# Altium PCB DigitalSensor.PcbDoc
Units mm, origin at the board's own origin, x right, y up, seen from the top; angles counter-clockwise.
Board outline 38.47 x 24.09 mm, 2 copper layers (Top Layer, Bottom Layer); 37 components, 25 nets, 144 pads, 37 vias.
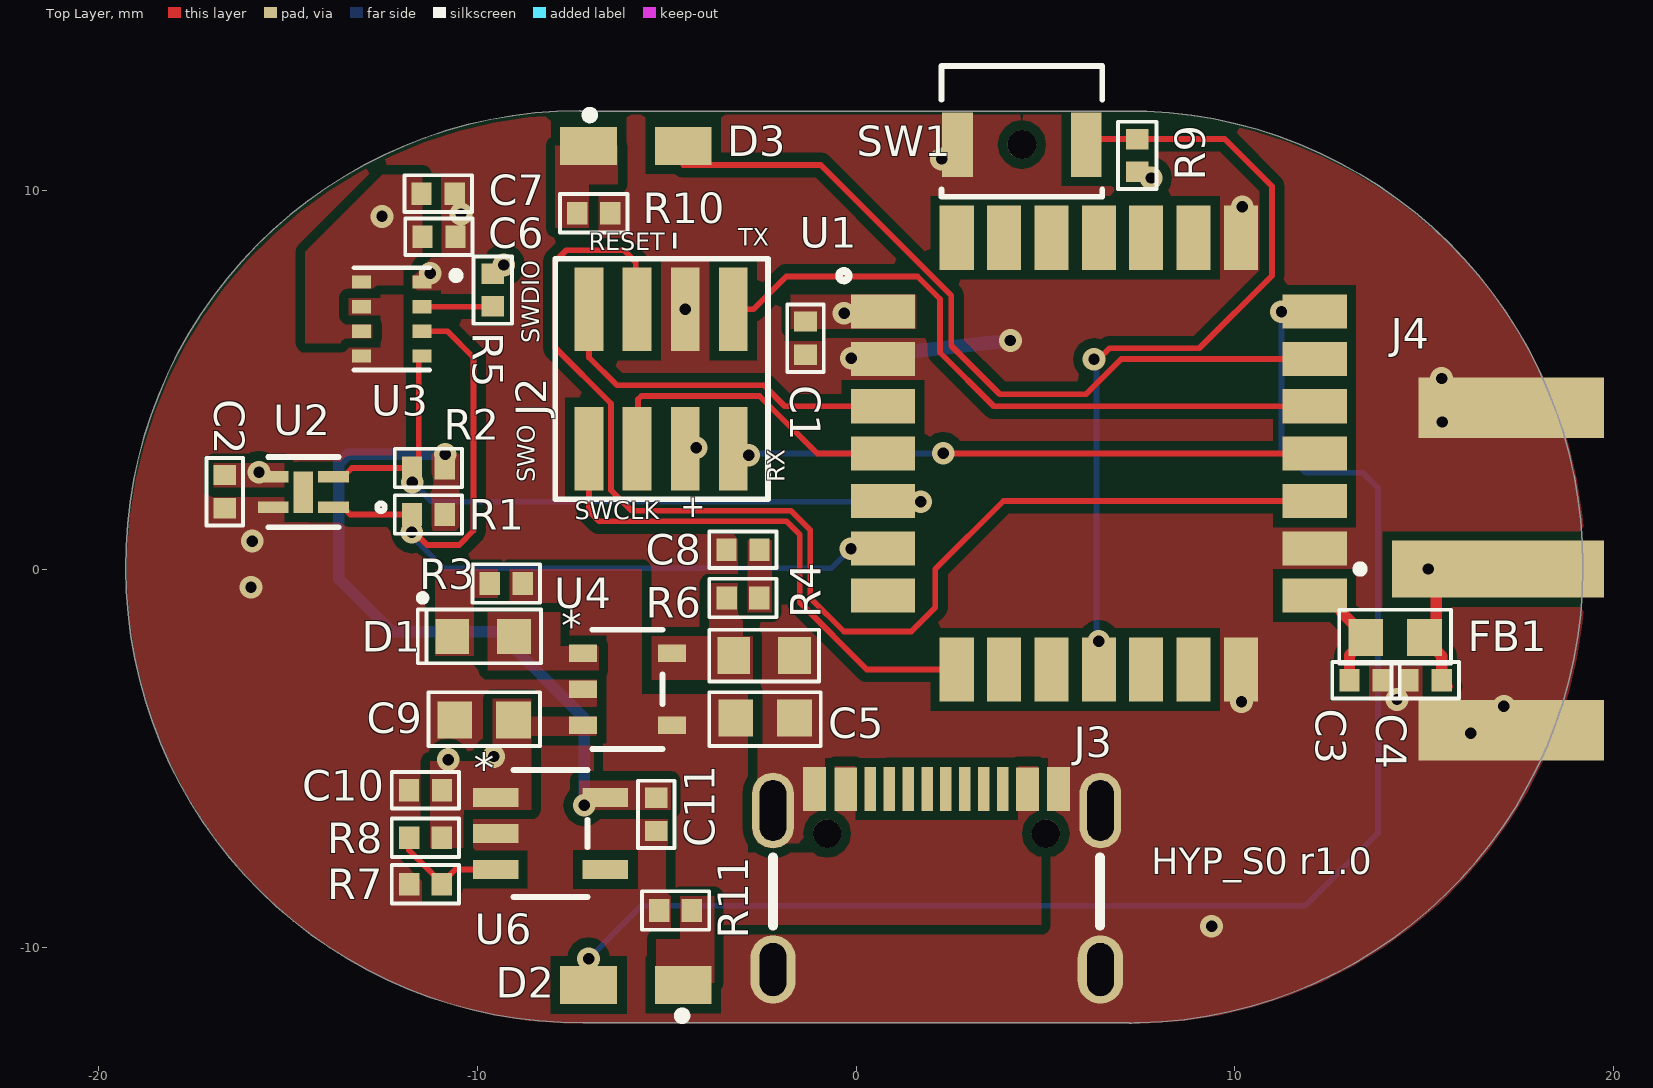
[diagram p0: Top Layer view]
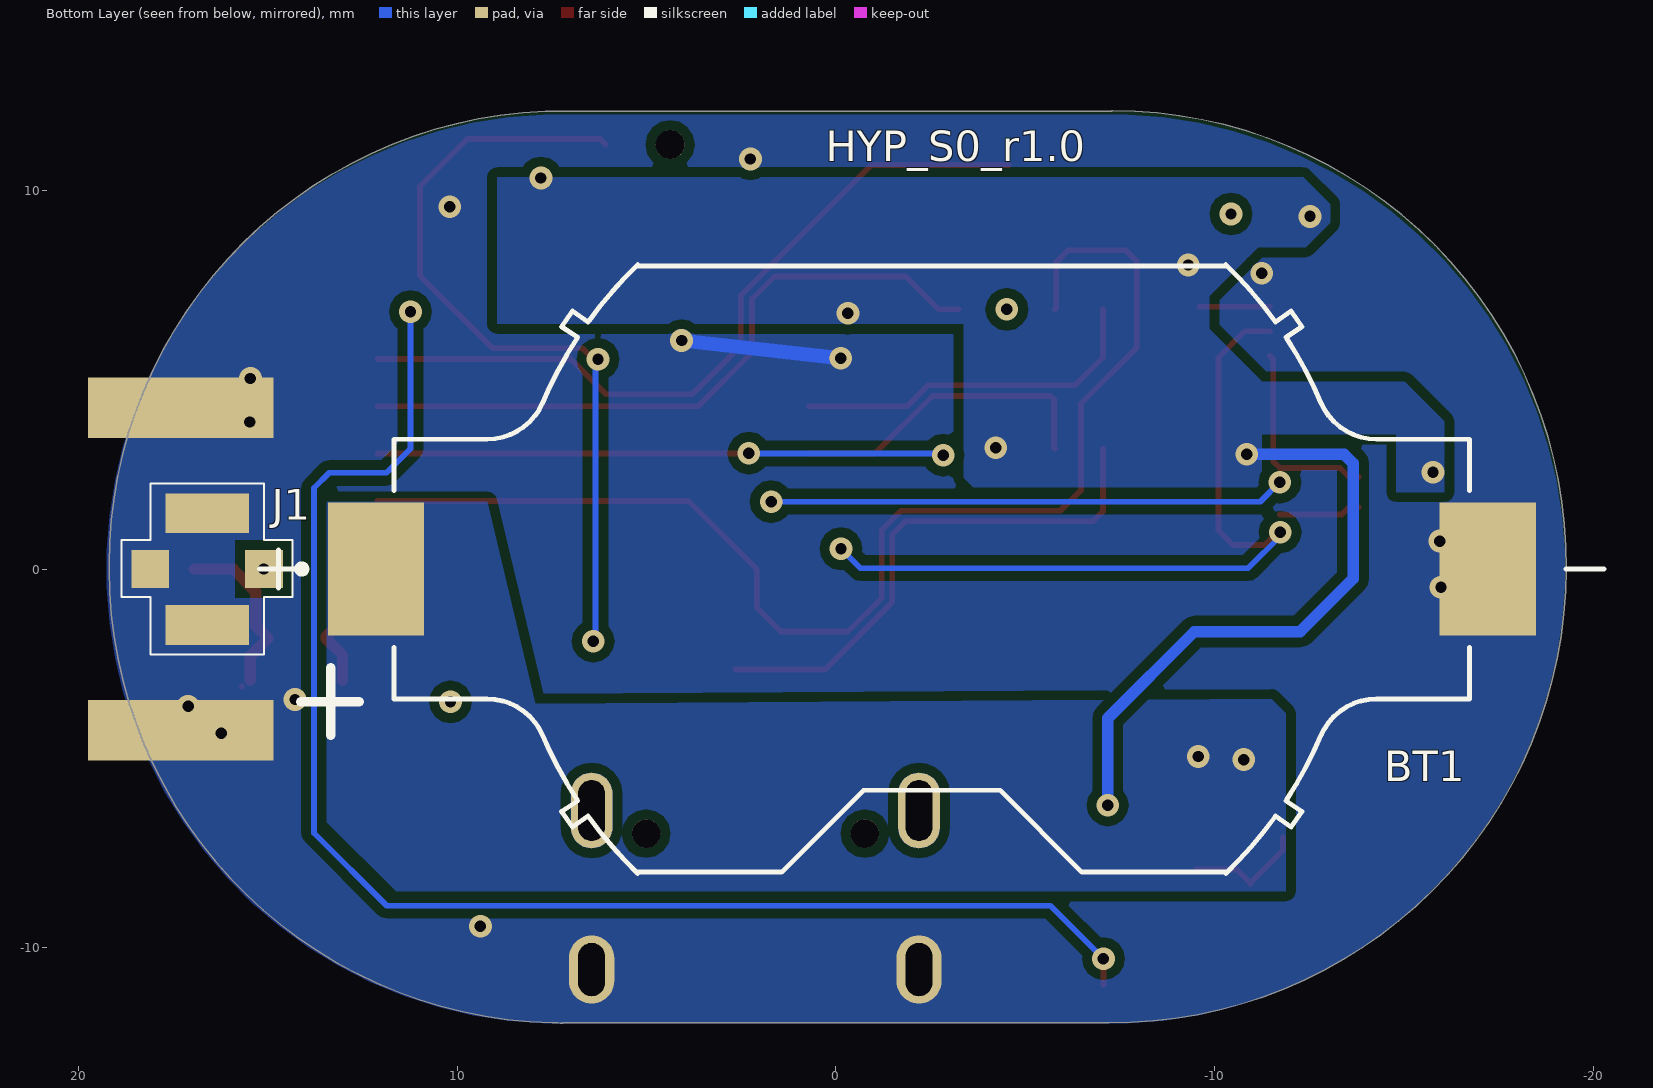
[diagram p1: Bottom Layer view, seen from below]
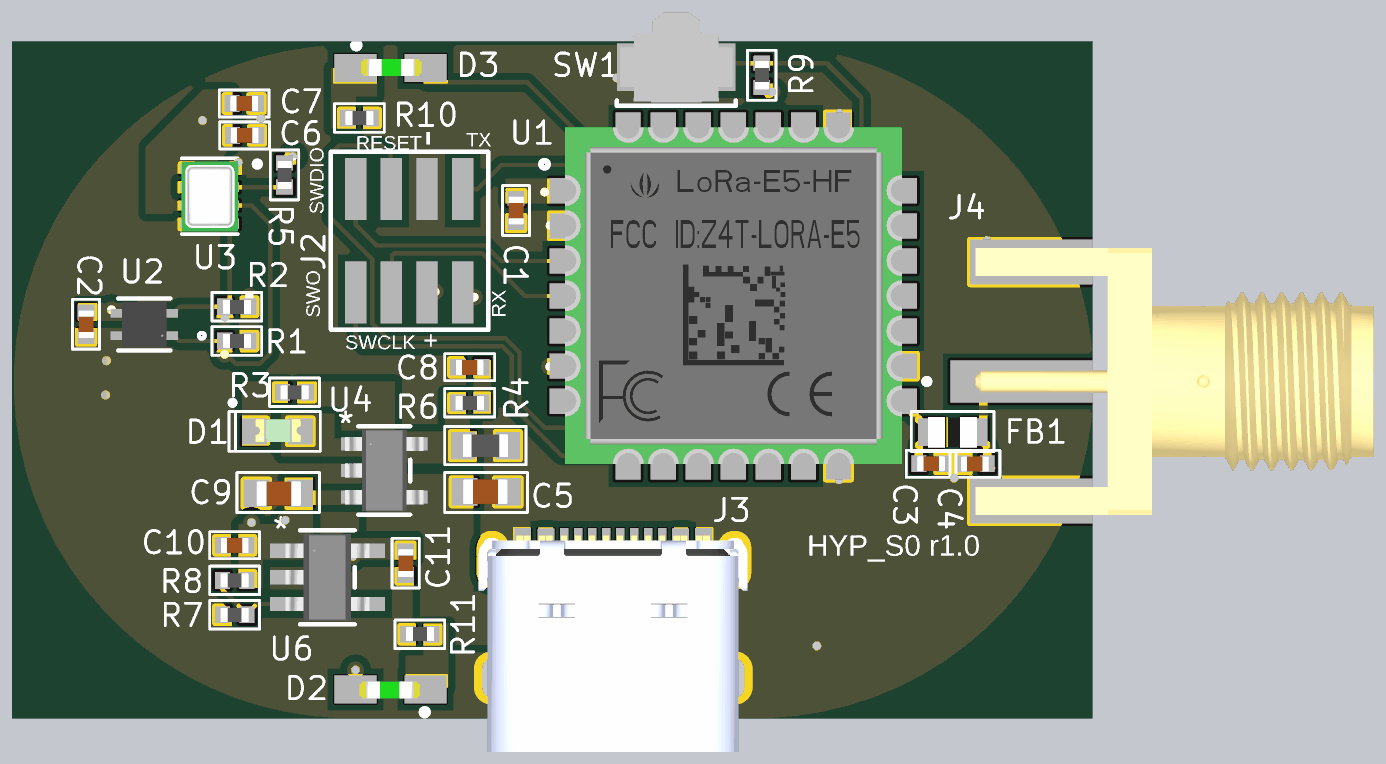
[diagram p2: 3D render of the assembled board from above, using the file's embedded part models]

## Layer stack, top to bottom
Top Solder: solder mask 0.0102, Solder Resist, Dk 3.5
Top Layer: signal copper 0.0356
Dielectric 1: dielectric 0.32, FR-4, Dk 4.8
Bottom Layer: signal copper 0.0356
Bottom Solder: solder mask 0.0102, Solder Resist, Dk 3.5

## Board outline
-19.288,0 ccw(c-7.311,0) -7.21,-11.977 ccw(c-7.184,-11.948) -7.184,-11.987 7.201,-11.987 ccw(c7.209,-11.949) 7.209,-11.988 ccw(c7.209,-0.01) 7.336,-11.987 7.463,-11.987 ccw(c7.463,-11.948) 7.476,-11.985 ccw(c7.209,-0.01) 19.186,-0.01 ccw(c7.209,-0.01) 19.185,0.11 ccw(c19.147,0.117) 19.186,0.117 ccw(c7.209,0.117) 7.081,12.093 -7.284,12.093 ccw(c-7.311,12.066) -7.311,12.104 ccw(c-7.311,0.127) -19.288,0.007 ccw(c-19.25,0)

## Design rules (kind name [scope] priority, off if disabled: settings)
Clearance [All] p1: gap=0.254 ignorepadtopadclearanceinfootprint=FALSE except(0: Arc-Hole Track-Hole SMDPad-Hole THPad-Hole Via-Hole Fill-Hole Poly-Hole Region-Hole Text-Hole; 0.127: Arc-Arc Arc-Track Arc-SMDPad Arc-THPad Arc-Via Track-Track Track-SMDPad Track-THPad Track-Via SMDPad-SMDPad SMDPad-THPad SMDPad-Via THPad-THPad THPad-Via Via-Via)
ComponentClearance [All] p1: gap=0.279 collisioncheckmode=3 verticalgap=0.279 showdistances=FALSE
MinimumSolderMaskSliver [All] p1: minsoldermaskwidth=0.025
PlaneConnect [All] p1: planeconnectstyle=Direct reliefexpansion=0.508 reliefentries=4 reliefconductorwidth=0.254 reliefairgap=0.254
PolygonConnect [All] p1: connectstyle=Direct reliefconductorwidth=0.254 reliefentries=4 polygonreliefangle="90 Angle" airgapwidth=0.254
RoutingVias [All] p1: holewidth=0.3 width=0.6 viastyle="Through Hole" minholewidth=0.3 minwidth=0.6 maxholewidth=0.3 maxwidth=0.6
SilkToSolderMaskClearance [IsPad] p1: minsilkscreentomaskgap=0.025 clearancetoexposedcopper=TRUE
SolderMaskExpansion [All] p1: expansion=0.102 istentingtop=FALSE
Width [All] p1: maxlimit=0.508 minlimit=0.025 preferedwidth=0.025 minimp=50.000000 maximp=50.000000 favimp=50.000000
26 further rules are at their usual default settings.

## Components (designator, comment, footprint, x,y, rotation, side; value= is the part's Value field where it differs from the comment)
BT1 "1058TR" BAT_1058TR -2.538,0 r180 bottom locked
C1 "4.7nF" C0402 -1.343,6.096 r90 top
C2 "100nF" C0402 -16.677,2.042 r90 top
C3 "0.1uF" C0402 13.459,-2.936 r180 top
C4 "0.1uF" C0402 15.023,-2.936 r0 top
C5 "1uF" C0603 -2.41,-3.937 r180 top
C6 "1uF" C0402 -11.022,8.776 r180 top
C7 "0.1uF" C0402 -11.04,9.913 r180 top
C8 "100nF" C0402 -2.994,0.508 r0 top
C9 "4.7uF" C0603 -9.827,-3.988 r0 top
C10 "1uF" C0402 -11.376,-5.842 r0 top
C11 "1uF" C0402 -5.28,-6.477 r90 top
D1 "SML-LX0603GW-TR" L0603 -9.852,-1.778 r0 top
D2 "Comment" "L0805 - GREEN" -5.819,-10.982 r180 top
D3 "Comment" "L0805 - GREEN" -5.819,11.176 r0 top
FB1 "30Ohm" FB0603 14.228,-1.81 r0 top
J1 "0734120114" MOLEX_0734120114 16.599,0 r90 bottom
J2 "CONN_8P_2" CONN_8P_1.27MM -7.058,3.175 r180 top
J3 "TYPE-C" USB4105-GF-TYPEC -2.199,-10.575 r0 top
J4 "EdgeMountSMA" EdgeMountSMA 19.745,0 r90 top locked
R1 "1K" R0402 -11.3,1.442 r0 top
R2 "1K" R0402 -11.3,2.667 r0 top
R3 "1K" R0402 -9.242,-0.381 r0 top
R4 "330R" R0603 -2.435,-2.286 r180 top
R5 "1K" R0402 -9.598,7.366 r90 top
R6 "Comment" R0402 -2.994,-0.762 r0 top
R7 "10K" R0402 -11.376,-8.321 r0 top
R8 "1K" R0402 -11.376,-7.092 r0 top
R9 "1K" R0402 7.42,10.922 r90 top
R10 "1K" R0402 -6.931,9.398 r0 top
R11 "1K" R0402 -4.772,-9.017 r180 top
SW1 "Comment" SW_B3U-3000P-B_OMR 4.372,11.557 r0 top
U1 "Wio-E5" Wio-E5 6.404,3.048 r0 top
U2 "SHT40-AD1B-R2" SHT4x_SEN-M -14.602,2.032 r180 top
U3 "BMP280" BOSCH_BMP280 -12.265,6.604 r0 top
U4 "STC4054GR" SOP_TSOT23-5L_STM-L -6.042,-3.175 r0 top
U6 "AP2112K" AP2112K -8.074,-6.985 r0 top

## Footprints (in the part's own frame and the unit in brackets; to place one, negate y for a bottom-side part, rotate by r counter-clockwise, add the part's x,y. Pads: shape width x height; smd on the part's side, far side on the other; paste and mask are expansions set on the pad)
AP2112K [mil]
  rect 47.15x20 smd paste+0 mask+0: 1(-57.08,37.4) 2(-57.08,0) 3(-57.08,-37.4) 4(57.08,-37.4) 5(57.08,37.4)
  silkscreen extent -38,-66 38,66, body extent -59,-61 59,61, height 51
BAT_1058TR [mm]
  rect 2.54x3.51 smd: N(14.68,0) P(-14.68,0)
  silkscreen extent -17.75,-8.04 17.75,8.04, body extent -15.8,-8.04 16.19,7.97, height 5.7
BOSCH_BMP280 [mm]
  rect 0.5x0.35 smd: 1(0.8,0.975) 2(0.8,0.325) 3(0.8,-0.325) 4(0.8,-0.975) 5(-0.8,-0.975) 6(-0.8,-0.325) 7(-0.8,0.325) 8(-0.8,0.975)
  silkscreen extent -1,-1.35 1.8,1.35, body extent -1,-1.25 1,1.25, height 1
C0402 [mm]
  rect 0.53x0.6 smd: 1(-0.437,0) 2(0.437,0)
  silkscreen extent -0.89,-0.48 0.89,0.48, body extent -0.5,-0.28 0.5,0.27, height 0.48
C0603 [mm]
  rect 0.92x0.98 smd: 1(-0.775,0) 2(0.775,0)
  silkscreen extent -1.47,-0.69 1.47,0.74, body extent -0.77,-0.46 0.83,0.44, height 0.79
CONN_8P_1.27MM [mil]
  rect 30x87 smd paste+0 mask+0: 1(0,0) 2(0,-145) 3(-50,0) 4(-50,-145) 5(-100,0) 6(-100,-145) 7(-150,0) 8(-150,-145)
  silkscreen extent -186,-198 35,53, body extent -50,-72 -40,-63, height 10
EdgeMountSMA [mm]
  rect 1.5x5.6 smd: 1(0,2.8)
  rect 1.6x4.9 smd: S1(-4.26,2.45) S2(4.26,2.45)
  rect 1.6x4.9 smd far side: S3(-4.26,2.45) S4(4.26,2.45)
  silkscreen extent -0.1,6.34 0.1,6.54, body extent -4.76,-9.5 4.76,4.7, height 4.35
FB0603 [mm]
  rect 0.92x0.98 smd: 1(-0.775,0) 2(0.775,0)
  silkscreen extent -1.47,-0.69 1.47,0.74, body extent -0.88,-0.55 0.88,0.55, height 1.09
L0603 [mm]
  rect 0.89x0.93 smd: A(-0.814,0) C(0.814,0)
  silkscreen extent -1.73,-0.71 1.52,1.07, body extent -0.77,-0.37 0.83,0.43, height 0.8
"L0805 - GREEN" [mm]
  rect 1.5x1 smd mask+0.051: A(1.25,0) C(-1.25,0)
  silkscreen extent -1.31,0.72 -1.13,0.9, body extent -1.05,-0.28 1.1,0.32, height 0.75
MOLEX_0734120114 [mm]
  rect 1x1 smd: 1(0,-1.5) 3(0,1.5)
  rect 1.05x2.2 smd: 2(-1.475,0) 4(1.475,0)
  silkscreen extent -2.26,-2.6 2.26,2.26, body extent -1.5,-1.54 1.5,1.54, height 1.27
R0402 [mm]
  rect 0.54x0.6 smd: 1(-0.432,0) 2(0.432,0)
  silkscreen extent -0.89,-0.51 0.89,0.51, body extent -0.5,-0.25 0.5,0.25, height 0.4
R0603 [mm]
  rect 0.87x0.98 smd: 1(-0.8,0) 2(0.8,0)
  silkscreen extent -1.45,-0.69 1.45,0.69, body extent -0.8,-0.4 0.8,0.4, height 0.55
SHT4x_SEN-M [mm]
  rect 0.806x0.306 smd paste+0 mask+0: 1(-0.797,0.4) 2(-0.797,-0.4) 3(0.797,-0.4) 4(0.797,0.4)
  rect 0.508x1.092 smd paste+0 mask+0: 5(0,0)
  silkscreen extent -2.15,-0.93 0.93,0.93, body extent -0.8,-0.8 0.8,0.8, height 0.59
SOP_TSOT23-5L_STM-L [mm]
  rect 0.747x0.458 smd paste+0 mask+0: 1(-1.174,0.95) 2(-1.174,0) 3(-1.174,-0.95) 4(1.174,-0.95) 5(1.174,0.95)
  silkscreen extent -0.93,-1.57 0.93,1.57, body extent -1.4,-1.45 1.4,1.45, height 1.09
SW_B3U-3000P-B_OMR [mil]
  rect 32x67 smd paste+0 mask+0: 1(66.93,-13.77) 2(-66.93,-13.77)
  round 30 hole 30 unplated: 3(0,-13.77)
  silkscreen extent -84,-68 84,68, body extent -79,-63 79,63, height 47
USB4105-GF-TYPEC [mm]
  rect 0.6x1.15 smd mask+0.051: A1(1.095,4.767) A4(1.924,4.766) A9(6.718,4.76) A12(7.541,4.764) A12(7.541,4.767)
  rect 0.3x1.15 smd mask+0.051: A5(3.07,4.767) A6(4.07,4.767) A7(4.566,4.767) A8(5.566,4.767) B5(6.066,4.767) B6(5.066,4.767) B7(3.57,4.767) B8(2.57,4.767)
  round 0.75 hole 0.75 unplated mask+0: NC(1.43,3.59) NC(7.206,3.59)
  oval 1.1x2 hole 0.7 slot 1.6 at 90 deg mask+0.051: S1(0,4.2) S3(8.645,4.2)
  oval 1.2x1.8 hole 0.7 slot 1.4 at 90 deg mask+0.051: S2(0,0) S4(8.645,0)
  silkscreen extent 0,1.15 8.64,2.97, body extent -0.48,-2.63 9.1,5.08, height 3.31
Wio-E5 [mm]
  rect 1.7x0.9 smd: 1(-5.7,3.75) 2(-5.7,2.5) 3(-5.7,1.25) 4(-5.7,0) 5(-5.7,-1.25) 6(-5.7,-2.5) 7(-5.7,-3.75) 15(5.7,-3.75) 16(5.7,-2.5) 17(5.7,-1.25) 18(5.7,0) 19(5.7,1.25) 20(5.7,2.5) 21(5.7,3.75)
  rect 0.9x1.7 smd: 8(-3.75,-5.7) 9(-2.5,-5.7) 10(-1.25,-5.7) 11(0,-5.7) 12(1.25,-5.7) 13(2.5,-5.7) 14(3.75,-5.7) 22(3.75,5.7) 23(2.5,5.7) 24(1.25,5.7) 25(0,5.7) 26(-1.25,5.7) 27(-2.5,5.7) 28(-3.75,5.7)
  silkscreen extent -6.86,4.57 -6.6,4.83, body extent -6,-6 6.02,6.02, height 2.53

## Part data
BT1: library part 20mm_BatteryHolder, Package=None, Availability=Unavailable, MP=1058TR, Part Number=20mm_BatteryHolder, Price=None, Que=136
C1: library part 0402YC472KAT2A, "CAP CER 4700PF 16V X7R 0402", Manufacturer="KYOCERA AVX", Package="0402(1005 Metric)", Temperature Coefficient=X7R, Tolerance=±10%, Voltage=16V, Datasheet=https://datasheets.avx.com/X7RDielectric.pdf, Manufacturer Part Number=0402YC472KAT2A, Name="Recep Aydin", Part Number=0402YC472KAT2A, Que=069, Type=Ceramic
C2 C8: library part CL05B104KB5NNNC, "402", Part Number=CL05B104KB5NNNC, Que=129
C3 C4 C7: library part 04023C104KAT2A, "CAP CER 0.1UF 25V X7R 0402", Manufacturer="AVX Corporation", Package="0402(1005 Metric)", Temperature Coefficient=X7R, Tolerance=±10%, Voltage=25V, Datasheet=https://datasheets.avx.com/X7RDielectric.pdf, Manufacturer Part Number=04023C104KAT2A, Name="Recep Aydin", Part Number=04023C104KAT2A, Que=009, Type=Ceramic
C5: library part CGA3E1X7R1E105M080AC, "CAP CER 1UF 25V X7R 0603", Manufacturer="TDK Corporation", Package="0603(1608 Metric)", Temperature Coefficient=X7R, Tolerance=±20%, Voltage=25V, Datasheet=https://product.tdk.com/en/system/files?file=dam/doc/product/capacitor/ceramic/mlcc/catalog/mlcc_automotive_general_en.pdf, Manufacturer Part Number=CGA3E1X7R1E105M080AC, Name="Recep Aydin", Part Number=CGA3E1X7R1E105M080AC, Que=017, Type=Ceramic
C6 C10 C11: library part CL05A105KO5NNNC, "CAP CER 1UF 16V X5R 0402", Manufacturer="Samsung Electro-Mechanics", Package="0402(1005 Metric)", Temperature Coefficient=X5R, Tolerance=±10%, Voltage=16V, Datasheet=https://media.digikey.com/pdf/Data%20Sheets/Samsung%20PDFs/CL05A105KO5NNNC_Spec_5-2-19.pdf, Manufacturer Part Number=CL05A105KO5NNNC, Name="Recep Aydin", Part Number=CL05A105KO5NNNC, Que=077, Type=Ceramic
C9: library part C1608X5R1E475K080AC, "CAP CER 4.7UF 25V X5R 0603", Manufacturer="TDK Corporation", Package="0603(1608 Metric)", Temperature Coefficient=X5R, Tolerance=±10%, Voltage=25V, Datasheet=https://www.digikey.com/en/products/detail/tdk-corporation/C1608X5R1E475K080AC/3648581, Manufacturer Part Number=C1608X5R1E475K080AC, Name="Recep Aydin", Part Number=C1608X5R1E475K080AC, Que=081, Type=Ceramic
D1: "LED GREEN DIFFUSED SMD", Color=Green, Current=20mA, Forward Voltage=2.2V, Manufacturer="Lumex Opto/Components Inc.", Package="0603(1608 Metric)", Datasheet=https://www.lumex.com/datasheet/SML-LX0603GW-TR, LensTransparency=Diffused, Manufacturer Part Number=SML-LX0603GW-TR, Name="Recep Aydin", Part Number=SML-LX0603GW-TR, Que=001
D2 D3: library part LTST-S220TBKT, "LED SMD 0805 BLUE 28-180mcd 130° WATER CLEAR", Datasheet=https://cdn.ozdisan.com/ETicaret_Dosya/453892_2682026.PDF, Part Number=LTST-S220TBKT, Que=010
FB1: library part 742792609, "FERRITE BEAD 30 OHM 0603 1LN", Current=3A, DC Resistance="30 Ohms @ 100 MHz", Manufacturer="Würth Elektronik", Package="0603 (1608 Metric)", Datasheet=https://www.we-online.com/katalog/datasheet/742792609.pdf, Filter Type="Power Line", Manufacturer Part Number=742792609, Name="Recep Aydin", Part Number=742792609, Que=013
J1: "CONN UMC RCPT STR 50 OHM SMD", Manufacturer=Molex, Connector Style="Receptacle, Male Pin", Contact Finish=Gold, Datasheet=https://www.molex.com/pdm_docs/ps/PS-73598-021-001.pdf, Manufacturer Part Number=0734120114, Mounting Type="Surface Mount Solder", Name="Recep Aydin", Number of Position=2, Part Number=0734120114, Que=021
J2: library part 8P_1.27mm, "8P_1.27mm", Part Number=8P_1.27mm, Que=138
J3: library part USB4105-GF-TYPEC, "Type-C", Package=None, Availability=Unavailable, Datasheet=https://gct.co/files/drawings/usb4105.pdf, MP=USB4125-GF-A_REVA2, Part Number=USB4105-GF-TYPEC, Price=None, Que=111
J4: Package=None, Availability="In Stock", Check_prices=https://www.snapeda.com/parts/CONSMA020.062-G/Linx/view-part/?ref=eda, MF="Linx Technologies", MP=CONSMA020.062-G, Part Number=EdgeMountSMA, Price=None, Purchase-URL=https://pricing.snapeda.com/search/part/CONSMA020.062-G/?ref=eda, Que=139, SnapEDA_Link=https://www.snapeda.com/parts/CONSMA020.062-G/Linx/view-part/?ref=snap
R1 R2 R5 R8: library part RT0402BRE071KL, "RES SMD 1K OHM 0.1% 1/16W 0402", Manufacturer=Yageo, Package=0402, Resistor Type="Thick Film", Tolerance=0.1%, Datasheet=https://www.yageo.com/upload/media/product/productsearch/datasheet/rchip/PYu-RT_1-to-0.01_RoHS_L_12.pdf, Manufacturer Part Number=RT0402BRE071KL, Name="Recep Aydin", Part Number=RT0402BRE071KL, Que=015
R3 R9 R10 R11: library part RC0402JR-071KL, "RES SMD 1K OHM 5% 1/16W 0402", Manufacturer=YAGEO, Package=0402, Resistor Type="Thick Film", Tolerance=5%, Datasheet=https://www.yageo.com/upload/media/product/productsearch/datasheet/rchip/PYu-RC_Group_51_RoHS_L_11.pdf, Manufacturer Part Number=RC0402JR-071KL, Name="Recep Aydin", Part Number=RC0402JR-071KL, Que=053
R4: library part RMCF0603FT330R, "RES 330 OHM 1% 1/10W 0603", Manufacturer="Stackpole Electronics Inc", Package=0603, Resistor Type="Thick Film", Tolerance=0.1%, Datasheet=https://www.seielect.com/catalog/sei-rmcf_rmcp.pdf, Manufacturer Part Number=RMCF0603FT330R, Name="Recep Aydin", Part Number=RMCF0603FT330R, Que=002
R6: library part RC0100FR-0720KL, "20K/402", Part Number=RC0100FR-0720KL, Que=164
R7: library part RC1005F103CS, "RES SMD 10K OHM 1% 1/16W 0402", Manufacturer="Samsung Electro-Mechanics", Package=0402, Resistor Type="Thick Film", Tolerance=0.1%, Datasheet=https://media.digikey.com/pdf/Data%20Sheets/Samsung%20PDFs/RC_Series_ds.pdf, Manufacturer Part Number=RC1005F103CS, Name="Recep Aydin", Part Number=RC1005F103CS, Que=004
SW1: library part SW_B3U-3000P-B_OMR, "SW_B3U-3000P-B_OMR", Manufacturer=Omron, Manufacturer Part Number=B3U-3000PM-B, Circuit=SPST, Datasheet=https://omronfs.omron.com/en_US/ecb/products/pdf/en-b3u.pdf, Part Number=SW_B3U-3000P-B_OMR, Que=012, SPN=B3U-3000PM-B
U1: "Seeed Lora Module", Manufacturer=Seeed, Package=MODULE28P-1.25-12X12X2.5MM, Core Processor="ARM® Cortex®-M4", Datasheet=https://www.seeedstudio.com/LoRa-E5-Wireless-Module-p-4745.html?queryID=6caec7778acb48c076fea09690b6cc83&objectID=4745&indexName=bazaar_retailer_products, DeviceSetName=MODULE_LORA_E5, GateName_1=G$1, LibraryName=LORA-E5_Eagle_Library, Manufacturer Part Number=Wio-E5, Part Number=Wio-E5, Que=018, SymbolName_1=MOUDLE_LORA_E5
U2: library part SHT40, Mfr_Name=Sensirion, Copyright="Copyright (C) 2023 Ultra Librarian. All rights reserved.", Manufacturer_Part_Number=SHT40-AD1B-R2, Part Number=SHT40, Que=007, RefDes=RefDes, Type=DEV
U3: "SENSOR PRESSURE ABS", Manufacturer="Bosch Sensortec", Package=8-SMD, Voltage (C-E max)="1.71V ~ 3.6V", Datasheet=https://www.bosch-sensortec.com/media/boschsensortec/downloads/datasheets/bst-bmp280-ds001.pdf, Manufacturer Part Number=BMP280, Name="Recep Aydin", Part Number=BMP280, Que=003
U4: "Battery Charger IC", Mfr_Name=STMicroelectronics, Part Number=STC4054GR, Que=011, RefDes=RefDes, Type=Type
U6: "LDO ADJ 3V3", Manufacturer="Diodes Incorporated", Manufacturer Part Number=AP2112K-3.3TRG1, Mfr_Name="Diodes Inc", Package=SOT25, VoltageOUT=3.3V, VoltageIN=6V, Datasheet=https://www.diodes.com/assets/Datasheets/AP2112.pdf, Name=AEG, Part Number=AP2112K, Que=036, RefDes=RefDes, Type=LDO

## Via types
v1: diameter 0.6, hole 0.3, Top Layer to Bottom Layer, tented both sides, 37 vias

## Nets (pads, with @x,y where several pads share a name; then routed paths per layer and width w, separated by ;. In a path a pad name is that pad's centre, name@x,y a point inside that pad or via, vN(x,y) a via of type N, cw(c..) or ccw(c..) an arc to the next point about the centre after c; other vN are vias at no path point)
BUTTON: R9.2 SW1.1 U1.11 | length 21
  Top Layer w0.152: SW1.1 6.219,11.354 R9.2 9.733,11.354 10.976,10.111 10.976,7.747 9.057,5.828 6.688,5.828 6.4,5.539 v1(6.279,5.539)
  Bottom Layer w0.152: v1(6.279,5.539) 6.341,5.476 6.341,-1.842 v1(6.404,-1.905)
GND: BT1.N C1.1 C2.1 C3.1 C4.1 C5.1 C6.1 C7.1 C8.1 C9.1 C10.1 C11.1 J1.2 J1.3 J1.4 J2.6 J3.A1 J3.A12 J3.S1 J3.S2 J3.S3 J3.S4 J4.S1 J4.S2 J4.S3 J4.S4 R4.1 R7.1 R10.2 R11.2 SW1.2 U1.2 U1.14 U1.16 U1.22 U2.4 U3.1 U3.5 U3.7 U4.2 U6.2 | length 4.2
  Bottom Layer w0.381: v1(-0.129,5.563) v1(4.07,6.035)
  other v1: 9.383,-9.431 16.221,-4.336 17.101,-3.626 10.173,-3.505 14.28,-3.444 -15.982,-0.481 -15.949,0.739 15.469,3.884 15.456,5.03 -4.518,6.858 -11.249,7.81 -10.439,9.376 10.193,9.566 2.252,10.828
LED1: D2.A U1.21 | length 38.6
  Top Layer w0.152: D2.A v1(-7.069,-10.289)
  Bottom Layer w0.152: v1(-7.069,-10.289) -5.67,-8.89 11.854,-8.89 13.775,-6.968 13.775,2.137 13.372,2.54 11.865,2.54 11.23,3.175 v1(11.227,6.796)
LED2: D3.A U1.20 | length 20.3
  Top Layer w0.152: -4.569,10.668 -0.936,10.668 2.511,7.221 2.511,5.894 3.788,4.616 6.067,4.616 6.999,5.548 U1.20
NetC4_2: C4.2 FB1.2 J1.1 J4.1 | length 4.5
  Top Layer w0.3: C4.2 15.46,-2.297 15.003,-1.84 FB1.2 15.313,-1.5 15.313,-0.6 15.913,0 J4.1
  other v1: 15.099,0
NetC8_2: C8.2 R6.2
NetD1_A: D1.A R3.1
NetD1_C: D1.C U4.1
NetD2_C: D2.C R11.1
NetD3_C: D3.C R10.1
NetR4_2: R4.2 R6.1 U4.5
NetR5_1: R5.1 U3.2 | length 1.9
  Top Layer w0.152: U3.2 -9.603,6.929 R5.1
NetR7_2: R7.2 R8.1 U6.3 | length 3.2
  Top Layer w0.152: R8.1 -11.808,-7.427 R7.2@-10.944,-8.291 ; R7.2 R7.2@-10.944,-8.291 ; U6.3 -10.588,-7.935 R7.2@-10.944,-8.291
RESET: J2.4 U1.17 | length 33.5
  Top Layer w0.152: J2.4 -5.823,6.893 -5.823,8.104 -6.137,8.417 -7.658,8.417 -7.947,8.128 -7.947,5.842 -6.474,4.369 -6.474,2.083 -5.93,1.539 -1.726,1.539 -1.216,1.03 -1.216,-0.762 -0.327,-1.651 1.451,-1.651 2.086,-1.016 2.086,0 3.884,1.798 U1.17
RFI0: C3.2 FB1.1 U1.15 | length 3.2
  Top Layer w0.3: U1.15 12.504,-0.702 12.804,-1.002 12.804,-1.131 13.453,-1.78 FB1.1 13.453,-1.84 13.022,-2.27 C3.2
RX: J2.7 U1.18 | length 14.9
  Top Layer w0.152: v1@2.34,3.048 U1.18
  Bottom Layer w0.152: v1@-2.867,3.048 2.285,3.048 v1(2.295,3.058)
  other v1: -2.838,3.006
SCL: R2.1 U1.5 U2.2 U3.4 | length 18.9
  Top Layer w0.152: U2.2 -13.555,2.432 -13.32,2.667 R2.1 -11.556,2.843 -11.556,5.538 U3.4
  Bottom Layer w0.152: v1(-11.725,2.295) -11.208,1.778 v1(1.705,1.778)
SDA: R1.1 U1.6 U2.1 U3.3 | length 22.5
  Top Layer w0.152: U2.1 -13.555,1.632 -13.365,1.442 R1.1 ; v1(-11.736,0.973) -11.665,0.973 -11.327,0.635 -10.487,0.635 -10.106,1.016 -10.106,5.588 -10.797,6.279 U3.3
  Bottom Layer w0.152: v1@-11.757,0.889 -10.889,0.021 -0.655,0.021 v1(-0.141,0.536)
SWCLK: J2.3 U1.4 | length 8.5
  Top Layer w0.152: J2.3 -5.764,3.199 -5.764,4.483 -5.675,4.572 -2.556,4.572 -1.032,3.048 U1.4
SWDIO: J2.2 U1.3 | length 9.6
  Top Layer w0.152: J2.2 -7.058,5.588 -6.321,4.851 -2.44,4.851 -1.887,4.298 U1.3
SWO: J2.1 U1.8 | length 14.1
  Top Layer w0.152: J2.1 -7.058,1.524 -6.794,1.26 -1.842,1.26 -1.495,0.914 -1.495,-0.878 0.279,-2.652 U1.8
TX: J2.8 U1.19 | length 18
  Top Layer w0.152: J2.8 -2.716,6.858 -1.851,7.723 1.614,7.723 2.209,7.128 2.209,5.719 3.63,4.298 U1.19
VBAT: BT1.P C9.2 C10.2 R8.2 U4.3 U6.1
  other v1: -10.778,-5.031 -9.575,-4.95
VBUS: C5.2 J3.A4 J3.A9 R3.2 U4.4
VCC: C1.2 C2.2 C6.2 C7.2 C11.2 J2.5 R1.2 R2.2 R5.2 R9.1 U1.1 U2.3 U3.6 U3.8 U6.5 | length 16.3
  Bottom Layer w0.3: v1(-10.852,3.032) -13.424,3.032 -13.662,2.794 -13.662,-0.254 -12.265,-1.651 -9.471,-1.651 -7.182,-3.94 v1(-7.182,-6.237)
  other v1: -15.771,2.558 -4.228,3.202 -0.322,6.755 -9.306,8.027 -12.525,9.312 7.785,10.326
pads on no net: J3.A5 J3.A6 J3.A7 J3.A8 J3.B5 J3.B6 J3.B7 J3.B8 J3.NC SW1.3 U1.7 U1.9 U1.10 U1.12 U1.13 U1.23 U1.24 U1.25 U1.26 U1.27 U1.28 U2.5 U6.4

## Polygon pours and split planes (outlines as drawn)
GND on Top Layer "GND_L01_P036" (solid, remove dead copper, pour order 36): -19.25,0 ccw(c-7.25,0) -7.25,-12 7.25,-12 ccw(c7.25,0) 19.25,0 ccw(c7.25,0) 7.25,12 -7.25,12 ccw(c-7.25,0)
no net on Top Layer "NONET_L-01_P-001" (solid, pour order 34): -1.724,0
no net on Top Layer "NONET_L-01_P-001" (solid, pour order 33): -19.25,0
VBUS on Top Layer "NONET_L-01_P-001" (solid, pour order 28): -9.344,0 -9.344,-0.889 -7.693,-0.889 -7.693,-1.905 -6.677,-1.905 -6.677,-5.334 -4.772,-5.334 -4.772,-9.398 4.88,-9.398 4.88,-5.207 4.245,-5.207 4.245,-6.604 0.181,-6.604 0.054,-5.207 -0.708,-5.207 -0.708,-7.493 -2.867,-7.493 -2.867,-3.302 -5.661,-3.302 -5.661,0
GND on Top Layer "NONET_L-01_P-001" (solid, pour order 23): -1.724,5.969 -1.724,5.08 1.578,5.08 1.578,5.969
VCC on Top Layer "NONET_L-01_P-001" (solid, pour order 20): -10.487,3.048 -10.487,1.016 -11.249,1.016 -11.249,3.048
VCC on Top Layer "NONET_L-01_P-001" (solid, pour order 19): -15.059,2.159 -16.964,2.159 -16.964,2.794 -15.059,2.794
VCC on Top Layer "NONET_L-01_P-001" (solid, pour order 16): -4.899,-5.588 -4.899,-6.35 -7.312,-6.35 -7.312,-5.588
VCC on Top Layer "NONET_L-01_P-001" (solid, pour order 14): 1.578,7.239 1.578,6.35 -1.724,6.35 -1.724,7.239
VCC on Top Layer "NONET_L-01_P-001" (solid, pour order 13): -11.459,10.414 -11.459,7.749 -11.969,7.239 -13.408,7.239 -13.408,6.604 -12.773,6.604 -12.773,5.969 -14.551,5.969 -14.551,8.382 -12.519,10.414
GND on Top Layer "NONET_L-01_P-001" (solid, pour order 12): -13.408,7.239 -11.884,7.239 -11.884,5.334 -13.408,5.334 -13.408,5.842 -12.519,5.842 -12.519,6.604 -13.408,6.604
VBAT on Top Layer "NONET_L-01_P-001" (solid, pour order 8): -6.873,-3.896 -8.943,-3.896 -8.993,-3.946 -8.905,-4.035 -8.905,-4.404 -6.873,-4.404
VBAT on Top Layer "NONET_L-01_P-001" (solid, pour order 7): -11.249,-7.366 -11.249,-5.08 -9.725,-5.08 -9.598,-4.953 -9.598,-3.429 -8.582,-3.429 -8.582,-6.35 -10.36,-6.35 -10.36,-7.366
NetD3_C on Top Layer "NONET_L-01_P-001" (solid, pour order 6): -6.296,11.176 -6.296,10.16 -7.058,10.16 -7.058,9.017 -7.947,9.017 -7.947,11.176
NetD2_C on Top Layer "NONET_L-01_P-001" (solid, pour order 5): -4.645,-8.636 -4.645,-9.779 -5.28,-9.779 -5.28,-10.922 -3.756,-10.922 -3.756,-8.636
NetD1_A on Top Layer "NONET_L-01_P-001" (solid, pour order 3): -9.471,0 -9.471,-0.762 -10.106,-0.762 -10.106,-2.286 -11.122,-2.286 -11.122,0
NetD1_C on Top Layer "NONET_L-01_P-001" (solid, pour order 2): -6.804,-2.032 -6.804,-2.667 -9.725,-2.667 -9.725,-1.143 -7.82,-1.143 -7.82,-2.032
NetR4_2 on Top Layer "NONET_L-01_P-001" (solid, pour order 1): -2.994,-0.381 -2.994,-1.778 -2.74,-1.778 -2.74,-2.921 -5.407,-2.921 -5.407,-1.778 -3.883,-1.778 -3.883,-0.381
NetC8_2 on Top Layer "NONET_L-01_P-001" (solid, pour order 0): -2.232,0.762 -2.232,-1.143 -2.867,-1.143 -2.867,0.762
VCC on Bottom Layer "NONET_L-01_P-001" (solid, pour order 30): -16.071,3.898 -15.023,4.946 -11.262,4.946 -9.862,6.346 -9.862,7.201 -11.159,8.497 -12.408,8.497 -13.056,9.145 -13.056,9.635 -12.338,10.354 -3.231,10.345 8.944,10.345 8.944,6.477 -3.375,6.477 -3.375,2.413 -3.629,2.159 -11.249,2.159 -11.249,3.556 -14.805,3.556 -14.805,2.032 -16.071,2.032
GND on Bottom Layer "GND_L02_P037" (solid, pour order 37): -19.25,0 ccw(c-7.25,0) -7.25,-12 7.25,-12 ccw(c7.25,0) 19.25,0 ccw(c7.25,0) 7.25,12 -7.25,12 ccw(c-7.25,0)
VBAT on Bottom Layer "NONET_L-01_P-001" (solid, pour order 29): 13.516,1.778 13.516,-6.604 11.611,-8.509 -11.884,-8.509 -11.884,-3.81 -11.503,-3.429 7.928,-3.556 9.198,1.778

## Silkscreen, mask and mechanical layers (free items; w line width, h text height)
Top Overlay:
  text "-" at -4.006,8.382 h2 r90
  text "TX" at -3.121,8.382 h0.8
  text "RESET" at -7.058,8.264 h0.8
  text "SWDIO" at -8.21,5.969 h0.8 r90
  text "SWO" at -8.337,2.286 h0.8 r90
  text "RX" at -1.724,2.286 h0.8 r90
  text "SWCLK" at -7.439,1.152 h0.8
  text "+" at -4.645,1.166 h1
  text "HYP_S0 r1.0" at 7.789,-8.293 h1.2
Bottom Overlay:
  lines w0.254: 12.59,-3.5 14.128,-3.5 13.331,-3.5 ; 13.331,-4.392 13.331,-2.609
  text "HYP_S0_r1.0" at 0.267,10.773 h0.8
BoardOutline:
  lines w0.254: -19.25,0 ccw(c-7.25,0) -7.25,-12 7.25,-12 ccw(c7.25,0) 19.25,0 ccw(c7.25,0) 7.25,12 -7.25,12 ccw(c-7.25,0) -19.25,0
  text "Fabrication Notes / 1) Use default 1mm thick 2 layer stackup / 2) Green solder mask / 3) White silk screen" at 24.385,-9.831 h3

## Text inside footprints (layer, text, board x,y; h text height)
BT1: Mechanical 13 "The rectangle area in the assembly layer denotes" at 13.972,-13.97 h0.8; Mechanical 13 "the zone for optional adhesive fixation." at 13.972,-15.57 h0.8
J4: Mechanical 13 "PCB Edge" at 20.715,5 h0.81 r90
U4: Mechanical 13 "*" at -6.906,-2.986 h1.27; Top Overlay "*" at -7.787,-1.894 h0.8
U6: Mechanical 13 "*" at -8.988,-6.746 h1.27; Top Overlay "*" at -10.095,-5.654 h0.8